# Allegro board gumstix_expansion_v1.brd
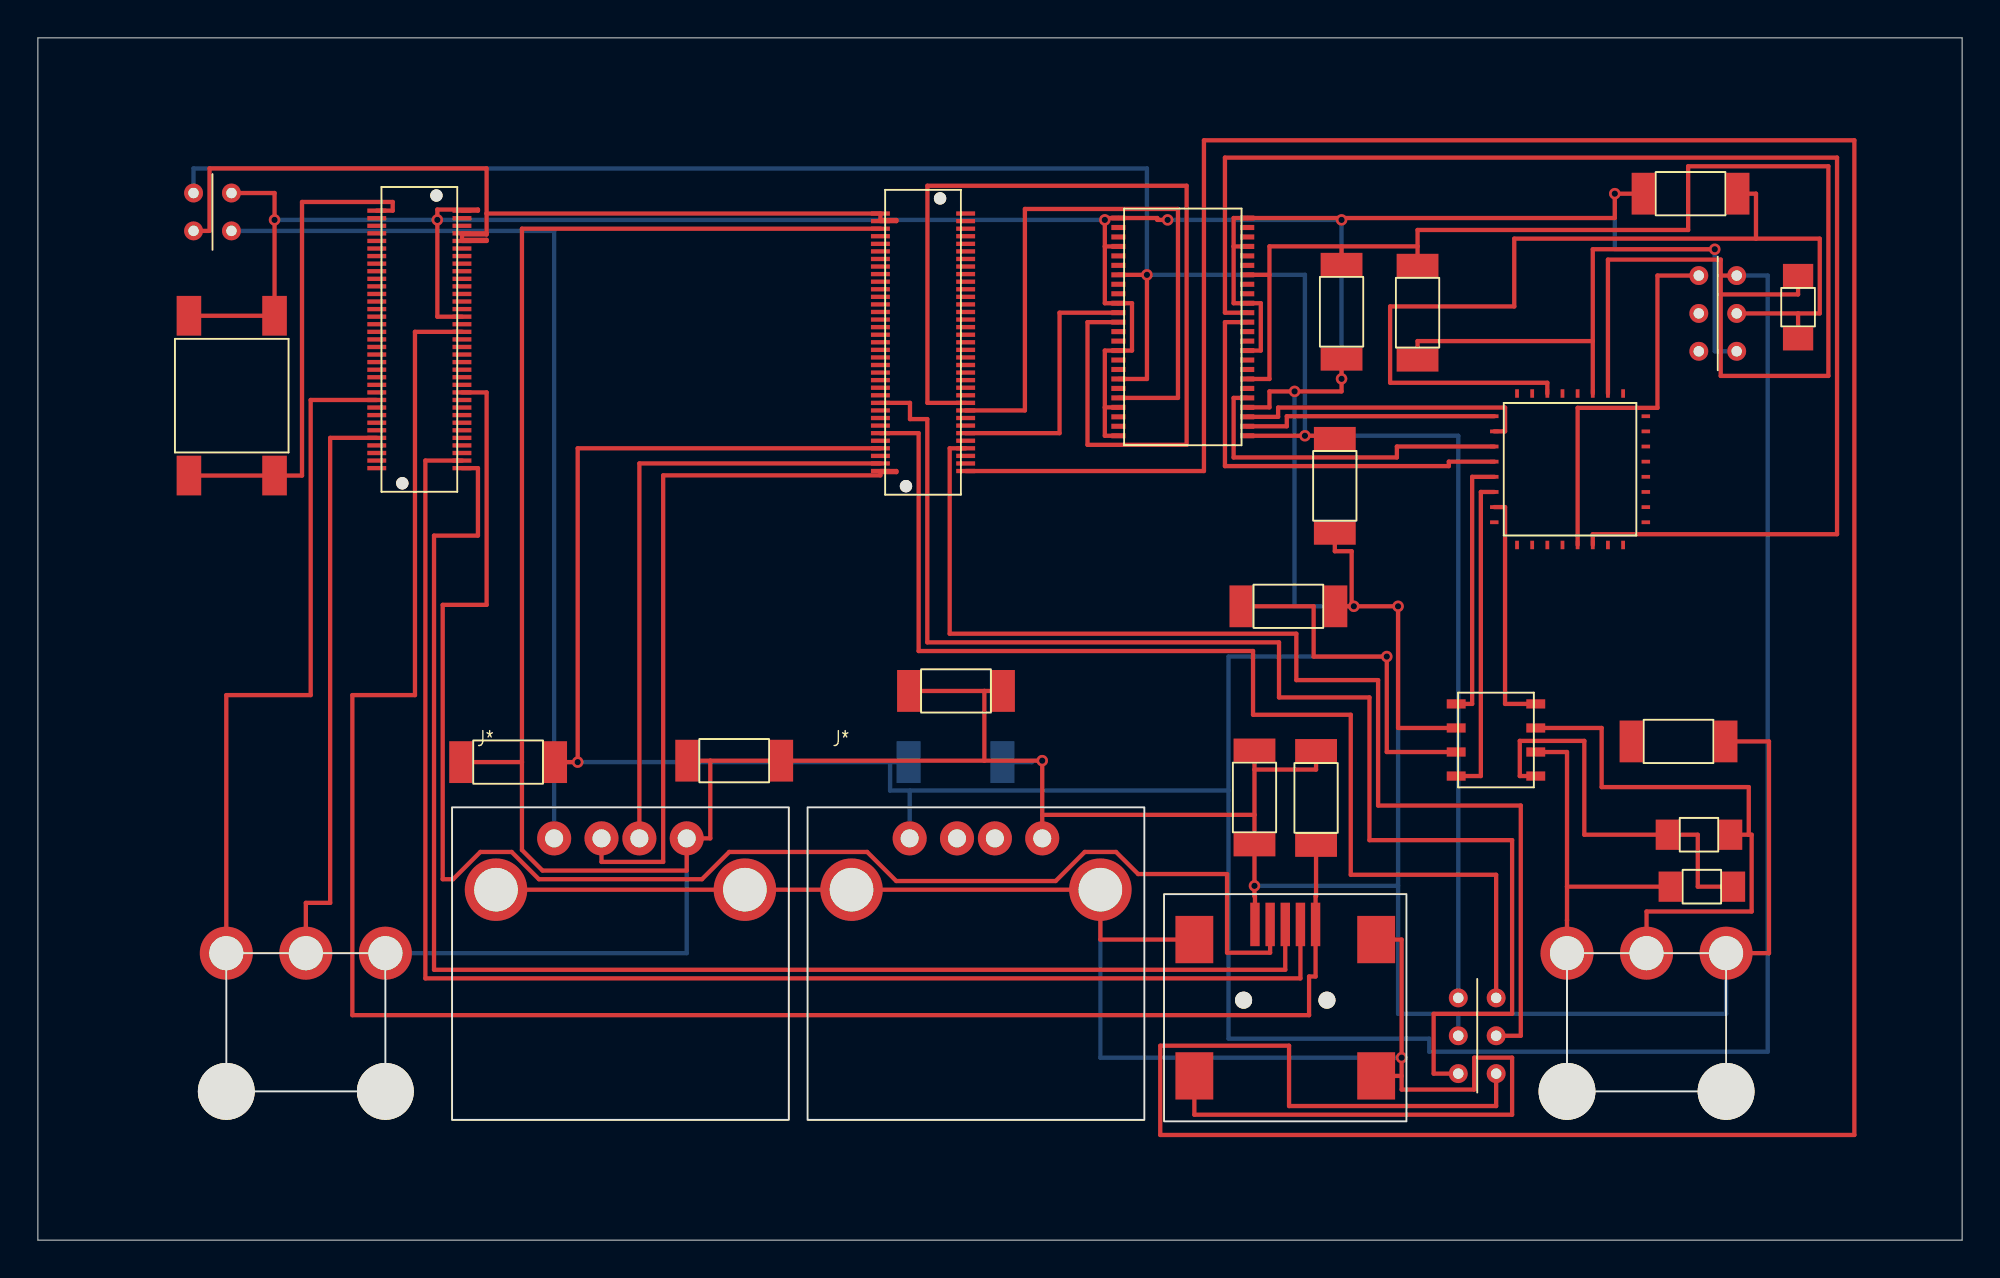
[diagram p0: board, top side]
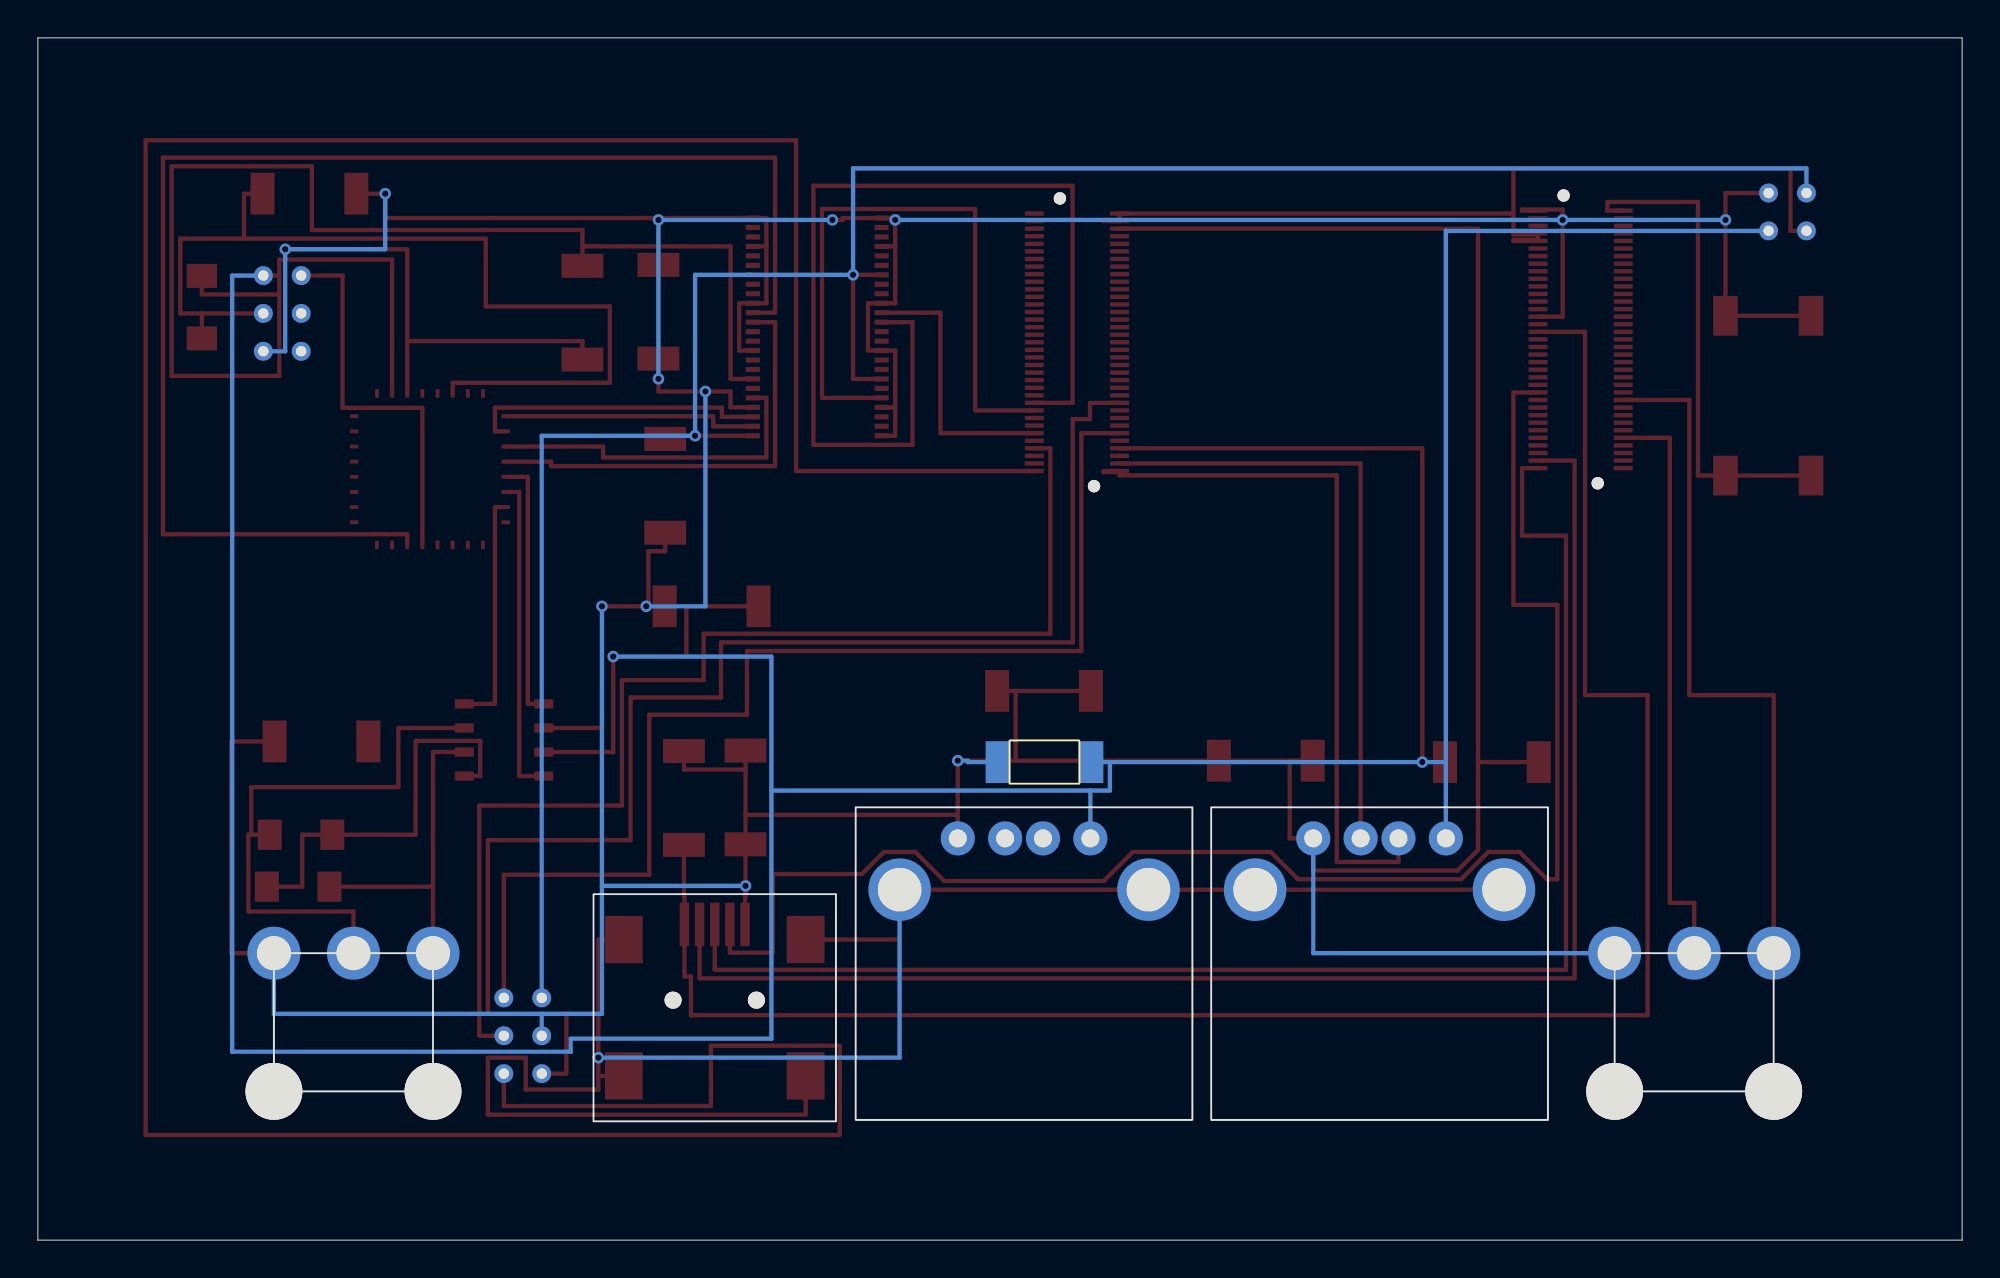
[diagram p1: board, bottom side, seen from below]

Outline 101.6 x 63.5 mm; copper layers: TOP, BOTTOM. Coordinates in mm from the lower left corner of the outline.
Outline path: 0,63.5 101.6,63.5 101.6,0 0,0 0,63.5

## Placement (name value [footprint] x y rotation side)
C1  4.7u  [SMDCAP]  24.89 25.25 0 top
C2  0.01u  [SMDCAP]  36.83 25.32 0 top
C3  4.7u  [SMDCAP]  48.39 25.25 180 bottom
C4  0.01u  [SMDCAP]  48.54 29.01 0 top
C5  4.7u  [SMDCAP]  67.49 23.29 270 top
C6  0.01u  [SMDCAP]  64.24 23.44 90 top
C7  0.1u  [SMDCAP]  68.83 49.1 90 top
C8  10u  [SMDCAP]  72.85 48.92 270 top
C9  0.1u  [SMDCAP]  66.09 33.48 0 top
C10  0.1u  [SMDCAP]  68.48 39.78 270 top
C11  0.1u  [SMDCAP]  86.56 26.34 180 top
C12  0.1u  [SMDCAP]  87.33 55.27 0 top
J1  GUMSTIX_J1  [GUMSTIX]  20.14 47.57 0 top
J2  GUMSTIX_J4  [GUMSTIX]  46.74 47.42 0 top
J3  4 HEADER  [DIP4_CONN]  9.22 54.31 0 top
J4  CON6  [USBA]  30.76 13.97 0 top
J6  CON6  [USBA]  49.53 13.97 0 top
J7  Background Header  [DIP6_CONN]  88.7 48.95 0 top
J9  CON3  [MOLEX_3]  14.15 11.51 0 top
J10  CON6  [DIP6_CONN]  76 10.8 0 top
J11  CON3  [MOLEX_3]  84.94 11.51 0 top
J12  CON9  [MUSBA_TSMT]  65.86 12.67 90 top
R3  60  [SMDRES]  87.71 21.41 0 top
R4  60  [SMDRES]  87.86 18.67 0 top
R5  10k  [SMDRES]  92.94 49.28 90 top
S1  -  [SWITCH]  10.24 44.6 270 top
U1  MC9S08DZ60  [MC9S08_LQFP32]  80.9 40.72 270 top
U2  SN74LVC16T245  [SN74_DGG]  60.45 48.23 180 top
U3  TJA1040T  [TJA1040_SO8]  76.99 26.42 0 top

## Library data of the parts
C1-C6 C8-C10 = C_elect_0: Tolerance: ***; User Part Number: ***
C7 C11 C12 = C: Tolerance: ***; User Part Number: ***
J1 = GUMSTIX_J1
J2 = GUMSTIX_J4
J3 = 4 HEADER
J4 J6 J10 = CON6
J7 = CONN MOD 6-6_J
J9 J11 = CON3
J12 = CON9
R3-R5 = R: Tolerance: ***; User Part Number: ***
S1 = SWITCH
U1 = MC9S08DZ60
U2 = SN74LVC16T245
U3 = TJA1040T

## Footprints (pads in the part's own frame, mm; a bottom-side part is the same pattern mirrored in y, then rotated)
DIP4_CONN
  round 1 hole 0.55: 1(-1,1) 2(-1,-1) 3(1,-1) 4(1,1)
DIP6_CONN
  round 1 hole 0.55: 1(-1,2) 2(-1,0) 3(-1,-2) 4(1,-2) 5(1,0) 6(1,2)
GUMSTIX
  round 0.65 hole 0.65 unplated: (-0.9,-7.6) (0.9,7.6)
  rect 1x0.23 smd: 1(-2.25,6.8) 2(-2.25,6.4) 3(-2.25,6) 4(-2.25,5.6) 5(-2.25,5.2) 6(-2.25,4.8) 7(-2.25,4.4) 8(-2.25,4) 9(-2.25,3.6) 10(-2.25,3.2) 11(-2.25,2.8) 12(-2.25,2.4) 13(-2.25,2) 14(-2.25,1.6) 15(-2.25,1.2) 16(-2.25,0.8) 17(-2.25,0.4) 18(-2.25,0) 19(-2.25,-0.4) 20(-2.25,-0.8) 21(-2.25,-1.2) 22(-2.25,-1.6) 23(-2.25,-2) 24(-2.25,-2.4) 25(-2.25,-2.8) 26(-2.25,-3.2) 27(-2.25,-3.6) 28(-2.25,-4) 29(-2.25,-4.4) 30(-2.25,-4.8) 31(-2.25,-5.2) 32(-2.25,-5.6) 33(-2.25,-6) 34(-2.25,-6.4) 35(-2.25,-6.8) 36(2.25,-6.8) 37(2.25,-6.4) 38(2.25,-6) 39(2.25,-5.6) 40(2.25,-5.2) 41(2.25,-4.8) 42(2.25,-4.4) 43(2.25,-4) 44(2.25,-3.6) 45(2.25,-3.2) 46(2.25,-2.8) 47(2.25,-2.4) 48(2.25,-2) 49(2.25,-1.6) 50(2.25,-1.2) 51(2.25,-0.8) 52(2.25,-0.4) 53(2.25,0) 54(2.25,0.4) 55(2.25,0.8) 56(2.25,1.2) 57(2.25,1.6) 58(2.25,2) 59(2.25,2.4) 60(2.25,2.8) 61(2.25,3.2) 62(2.25,3.6) 63(2.25,4) 64(2.25,4.4) 65(2.25,4.8) 66(2.25,5.2) 67(2.25,5.6) 68(2.25,6) 69(2.25,6.4) 70(2.25,6.8)
MC9S08_LQFP32
  rect 0.45x0.2 smd: 1(-4,2.8) 2(-4,2) 3(-4,1.2) 4(-4,0.4) 5(-4,-0.4) 6(-4,-1.2) 7(-4,-2) 8(-4,-2.8) 17(4,-2.8) 18(4,-2) 19(4,-1.2) 20(4,-0.4) 21(4,0.4) 22(4,1.2) 23(4,2) 24(4,2.8)
  rect 0.2x0.45 smd: 9(-2.8,-4) 10(-2,-4) 11(-1.2,-4) 12(-0.4,-4) 13(0.4,-4) 14(1.2,-4) 15(2,-4) 16(2.8,-4) 25(2.8,4) 26(2,4) 27(1.2,4) 28(0.4,4) 29(-0.4,4) 30(-1.2,4) 31(-2,4) 32(-2.8,4)
MOLEX_3
  round 3 hole 3 unplated: (-4.2,-3.65) (4.2,-3.65)
  round 2.8 hole 1.8: 1(-4.2,3.65) 2(0,3.65) 3(4.2,3.65)
MUSBA_TSMT
  round 0.9 hole 0.9 unplated: (0,2.2) (0,-2.2)
  rect 2.3x0.5 smd: 1(4,-1.6) 2(4,-0.8) 3(4,0) 4(4,0.8) 5(4,1.6)
  rect 2.5x2 smd: 6(-4,4.8) 7(-4,-4.8) 8(3.2,-4.8) 9(3.2,4.8)
SMDCAP
  rect 1.27x2.21 smd: 1(-2.54,0) 2(2.413,0)
SMDRES
  rect 1.27x1.6 smd: 1(-1.651,0) 2(1.651,0)
SN74_DGG
  rect 0.75x0.27 smd: 1(-3.4,5.75) 2(-3.4,5.25) 3(-3.4,4.75) 4(-3.4,4.25) 5(-3.4,3.75) 6(-3.4,3.25) 7(-3.4,2.75) 8(-3.4,2.25) 9(-3.4,1.75) 10(-3.4,1.25) 11(-3.4,0.75) 12(-3.4,0.25) 13(-3.4,-0.25) 14(-3.4,-0.75) 15(-3.4,-1.25) 16(-3.4,-1.75) 17(-3.4,-2.25) 18(-3.4,-2.75) 19(-3.4,-3.25) 20(-3.4,-3.75) 21(-3.4,-4.25) 22(-3.4,-4.75) 23(-3.4,-5.25) 24(-3.4,-5.75) 25(3.4,-5.75) 26(3.4,-5.25) 27(3.4,-4.75) 28(3.4,-4.25) 29(3.4,-3.75) 30(3.4,-3.25) 31(3.4,-2.75) 32(3.4,-2.25) 33(3.4,-1.75) 34(3.4,-1.25) 35(3.4,-0.75) 36(3.4,-0.25) 37(3.4,0.25) 38(3.4,0.75) 39(3.4,1.25) 40(3.4,1.75) 41(3.4,2.25) 42(3.4,2.75) 43(3.4,3.25) 44(3.4,3.75) 45(3.4,4.25) 46(3.4,4.75) 47(3.4,5.25) 48(3.4,5.75)
SWITCH
  rect 2.1x1.3 smd: 1(-4.22,2.26) 2(-4.22,-2.26) 3(4.22,-2.26) 4(4.22,2.26)
TJA1040_SO8
  rect 1x0.49 smd: 1(-2.1,1.905) 2(-2.1,0.635) 3(-2.1,-0.635) 4(-2.1,-1.905) 5(2.1,-1.905) 6(2.1,-0.635) 7(2.1,0.635) 8(2.1,1.905)
USBA
  round 3.3 hole 2.3 unplated: (-6.57,4.54) (6.57,4.54)
  round 1.8 hole 0.95: 1(-3.5,7.25) 2(-1,7.25) 3(1,7.25) 4(3.5,7.25)

## Nets
GND: C1.1(+) C2.1(+) C2.2(-) C3.1(+) C4.1(+) C4.2(-) C5.1(+) C6.1(+) C6.2(-) C7.1 C8.2(-) C9.2(-) C10.2(-) C11.1 C12.1 J1.56(GND#56) J1.70(GND#70) J2.3(GND#3) J2.33(GND#33) J3.4 J4.4 J6.4 J7.4(2) J9.3 J10.2 J11.3 J12.5 S1.1 S1.2 U1.3(VSS) U2.4(GND#4) U2.10(GND#10) U2.15(GND#15) U2.21(GND#21) U2.24(2DIR) U2.25(2OEN) U2.28(GND#28) U2.34(GND#34) U2.39(GND#39) U2.45(GND#45) U2.48(1OEN) U3.2(GND)
VCC_1.8: C10.1(+) J3.1 J10.1 U2.1(1DIR) U2.31(VCCA#31) U2.42(VCCA#42)
VCC_3.3: J1.66(VSYSTEM#66) J1.67(VSYSTEM#67) J2.1(VSYSTEM#1) J2.2(VSYSTEM#2) J3.2
BKGD: J7.1 U1.21(BKGD/MS)
CANH: J11.2 R3.2 U3.7(CANH)
CANL: J11.1 R4.1 U3.6(CANL)
COMMON_SHIELD: J12.6 J12.7 J12.8 J12.9
GPIO18: J2.26(GPIO18_MMC3_D0) J10.3
GPIO19: J2.36(GPIO19_MMC3_D1) J10.4
GPIO20: J2.39(GPIO20_MMC3_D2) J10.5
GPIO21: J2.30(GPIO21_MMC3_DAT7) J10.6
GPIO165_IR_RXD3: J1.31(GPIO165_IR_RXD3) J9.2
GPIO166_IR_TXD3: J1.26(GPIO166_IR_TXD3) J9.1
RESET: C12.2 J7.5(4) R5.1 U1.6(RESETN)
RXCAN: U1.14(PTE7/RXD2/RXCAN) U3.4(RXD)
SPI_CLOCK_1.8V: J2.43(GPIO171_SPI1_CLK) U2.46(1A2)
SPI_CLOCK_5V: U1.10(PTE3/SPSCK) U2.3(1B2)
SPI_CS_1.8V: J2.42(GPIO175_SPI1_CS1) U2.47(1A1)
SPI_CS_5V: U1.9(PTE2/SSN) U2.2(1B1)
SPI_INTERRUPT_1.8V: J2.41(GPIO114_SPI1_NIRQ) U2.35(2A2)
SPI_INTERRUPT_5V: U1.22(PTB0/PIB0/ADP8) U2.14(2B2)
SPI_MISO_1.8V: J2.45(GPIO173_SPI1_MISO) U2.36(2A1)
SPI_MISO_5V: U1.12(PTE5/SDA/MISO) U2.13(2B1)
SPI_MOSI_1.8V: J2.44(GPIO172_SPI1_MOSI) U2.44(1A3)
SPI_MOSI_5V: U1.11(PTE4/SCL/MOSI) U2.5(1B3)
STB: U1.15(PTD0/PID0/TPM2CH0) U3.8(STB)
TXCAN: U1.13(PTE6/TXD2/TXCAN) U3.1(TXD)
USB_OTG_DM: J1.37(USBOTG_DM) J12.2
USB_OTG_DP: J1.36(USBOTG_DP) J12.3
USB_OTG_ID: J1.46(USBOTG_ID) J12.4
USB_OTG_VBUS: C5.2(-) J1.54(USBOTG_VBUS) J12.1
USBH_DM: J2.35(USBH_DM) J4.2
USBH_DP: J2.34(USBH_DP) J4.3
USBH_VBUS: C1.2(-) C3.2(-) C7.2 C8.1(+) C9.1(+) J2.32(USBH_VBUS) J3.3 J4.1 J6.1 J7.6 R5.2 U1.2(VDD) U2.7(VCCB#7) U2.18(VCCB#18) U3.3(VCC)
N03550: J1.1(NRESPWRON) S1.3 S1.4
N10323: R3.1 R4.2 U3.5(SPLIT)

Pads without a net: C11 2; J1 2 3 4 5 6 7 8 9 10 11 12 13 14 15 16 17 18 19 20 21 22 23 24 25 27 28 29 30 32 33 34 35 38 39 40 41 42 43 44 45 47 48 49 50 51 52 53 55 57 58 59 60 61 62 63 64 65 68 69; J2 4 5 6 7 8 9 10 11 12 13 14 15 16 17 18 19 20 21 22 23 24 25 27 28 29 31 37 38 40 46 47 48 49 50 51 52 53 54 55 56 57 58 59 60 61 62 63 64 65 66 67 68 69 70; J6 2 3; J7 2 3; U1 1 4 5 7 8 16 17 18 19 20 23 24 25 26 27 28 29 30 31 32; U2 6 8 9 11 12 16 17 19 20 22 23 26 27 29 30 32 33 37 38 40 41 43

## Via types
v1: diameter 0.61, hole 0.33, TOP to BOTTOM, 18 vias

## Routing (per net, layer and track width the routed paths; a pad name or vN(x,y) marks a point on that pad's centre or on a via; arc(x,y) is an arc through that point)
GND: length 434.1
  TOP w0.229: J2.3 25.56,53.42 25.56,25.25 ; 25.56,25.25 25.56,20.61 26.64,19.52 34.26,19.52 J4.4 35.5,21.22 35.5,25.32 ; 25.56,25.25 C1.1 ; 35.5,25.32 C2.2 49.97,25.32 ; 35.5,25.32 C2.1 ; 63.13,52.48 63.13,53.98 U2.24 83.26,53.98 v1(83.26,55.27) C12.1 ; 63.13,52.48 63.13,49.48 U2.15 64.57,49.48 64.57,46.98 U2.10 ; 63.13,52.48 U2.21 ; 49.97,25.32 49.97,29.01 ; 49.97,25.32 v1(53.03,25.32) 53.03,22.46 ; 49.97,29.01 C4.1 ; 49.97,29.01 C4.2 ; C10.2 68.48,36.39 69.37,36.39 69.37,33.48 ; 56.33,52.48 56.33,49.48 U2.34 57.77,49.48 57.77,46.98 U2.39 56.33,46.98 56.33,43.98 ; 56.33,52.48 v1(56.33,53.89) 56.33,53.98 U2.25 59.1,53.98 59.1,53.89 v1(59.65,53.89) ; 56.33,52.48 U2.28 ; J1.56 21.09,48.77 v1(21.09,53.89) 21.09,54.43 23.24,54.43 23.24,54.37 J1.70 ; 69.37,33.48 v1(69.48,33.48) v1(71.82,33.48) 71.82,27.05 U3.2 ; 69.37,33.48 C9.2 ; C8.2 72.85,47.49 82.1,47.49 ; U2.45 56.33,43.98 ; 56.33,43.98 56.33,42.48 U2.48 ; S1.2 S1.1 v1(12.5,53.89) 12.5,55.31 J3.4 ; U1.3 82.1,47.49 ; 82.1,47.49 82.1,52.33 v1(88.54,52.33) ; C7.1 v1(68.83,45.49) 68.83,44.83 v1(66.35,44.83) 65.03,44.83 65.03,43.98 U2.4 ; 64.24,22.46 C6.1 v1(64.24,18.71) 64.24,18.17 64.26,18.17 J12.5 ; 64.24,22.46 64.24,24.85 ; 64.24,22.46 53.03,22.46 ; J11.3 91.4,15.16 91.4,26.34 C11.1 ; 64.24,24.85 67.49,24.85 C5.1 ; 64.24,24.85 C6.2 ; 53.03,22.46 J6.4
  BOTTOM w0.229: J7.4 88.54,46.95 v1(88.54,52.33) 83.26,52.33 v1(83.26,55.27) ; v1(66.35,44.83) 66.35,33.48 v1(69.48,33.48) ; C3.1 52.48,25.25 52.48,25.32 v1(53.03,25.32) ; J10.2 75,11.95 ; 75,11.95 71.82,11.95 71.82,18.71 ; 75,11.95 89.14,11.95 J11.3 ; v1(12.5,53.89) v1(21.09,53.89) v1(56.33,53.89) ; 71.82,18.71 v1(64.24,18.71) ; 71.82,18.71 v1(71.82,33.48) ; v1(68.83,45.49) v1(68.83,53.89) v1(59.65,53.89) ; J9.3 34.26,15.16 J4.4
VCC_1.8: length 125.2
  TOP w0.229: U2.42 58.56,45.48 v1(58.56,50.98) U2.31 ; C10.1 68.48,42.48 v1(66.9,42.48) U2.1
  BOTTOM w0.229: J3.1 8.22,56.61 58.56,56.61 v1(58.56,50.98) 66.9,50.98 v1(66.9,42.48) 75,42.48 J10.1
VCC_3.3: length 50.7
  TOP w0.229: 23.69,53.17 23.69,53.12 22.39,53.12 22.39,52.83 23.69,52.83 23.69,52.77 J1.66 ; 23.69,53.17 J1.67 ; 23.69,53.17 23.69,54.22 ; J2.2 45.33,53.82 45.33,53.88 44.49,53.88 J2.1 23.69,54.22 ; 23.69,54.22 23.69,56.61 9.06,56.61 9.06,53.31 J3.2
BKGD: length 20.6
  TOP w0.229: J7.1 85.51,50.95 85.51,43.96 81.3,43.96 U1.21
CANH: length 29.8
  TOP w0.229: 90.34,21.41 90.49,21.41 90.49,17.36 84.94,17.36 J11.2 ; 90.34,21.41 R3.2 ; 90.34,21.41 90.34,23.93 82.57,23.93 82.57,27.05 U3.7
CANL: length 17.7
  TOP w0.229: 80.74,18.67 80.74,25.78 U3.6 ; 80.74,18.67 R4.1 ; 80.74,18.67 80.74,16.9 J11.1
COMMON_SHIELD: length 104.3
  TOP w0.229: 72.01,8.67 v1(72.01,9.64) 72.01,15.87 J12.8 ; 72.01,8.67 72.01,7.95 75.84,7.95 75.84,9.64 77.84,9.64 77.84,6.62 61.06,6.62 J12.6 ; 72.01,8.67 J12.7 ; 24.19,18.51 56.1,18.51 56.1,15.87 J12.9
  BOTTOM w0.229: 56.1,18.51 56.1,9.64 v1(72.01,9.64)
GPIO18: length 74.2
  TOP w0.229: J10.3 73.7,8.8 73.7,11.95 77.84,11.95 77.84,21.13 70.31,21.13 70.31,28.66 65.53,28.66 65.53,31.57 46.96,31.57 46.96,43.36 46.05,43.36 46.05,44.22 J2.26
GPIO19: length 180.9
  TOP w0.229: J10.4 77,7.08 66.06,7.08 66.06,10.27 59.26,10.27 59.26,5.56 95.91,5.56 95.91,58.09 61.57,58.09 61.57,40.62 J2.36
GPIO20: length 63.3
  TOP w0.229: J10.5 78.3,10.8 78.3,22.95 70.76,22.95 70.76,29.58 66.45,29.58 66.45,32.03 48.14,32.03 48.14,41.82 J2.39
GPIO21: length 62.3
  TOP w0.229: J2.30 46.5,42.62 46.5,31.11 64.16,31.11 64.16,27.75 69.32,27.75 69.32,19.3 77,19.3 J10.6
GPIO165_IR_RXD3: length 31
  TOP w0.229: J1.31 15.43,42.37 15.43,17.81 14.15,17.81 J9.2
GPIO166_IR_TXD3: length 37.2
  TOP w0.229: J9.1 9.95,28.79 14.4,28.79 14.4,44.37 J1.26
RESET: length 52.2
  TOP w0.229: R5.1 92.94,48.95 ; 92.94,48.95 94.08,48.95 94.08,52.9 90.72,52.9 ; 92.94,48.95 J7.5 ; 90.72,52.9 77.95,52.9 77.95,49.31 71.4,49.31 71.4,45.28 79.7,45.28 U1.6 ; 90.72,52.9 90.72,55.27 C12.2
RXCAN: length 17
  TOP w0.229: U3.4 76.19,24.51 76.19,39.52 U1.14
SPI_CLOCK_5V: length 15.9
  TOP w0.229: U1.10 77.47,42.72 77.47,43.97 65.48,43.97 65.48,43.48 U2.3
SPI_CS_5V: length 13.6
  TOP w0.229: U2.2 65.94,42.98 65.94,43.52 U1.9
SPI_INTERRUPT_1.8V: length 14.4
  TOP w0.229: U2.35 53.94,48.98 53.94,42.62 J2.41
SPI_INTERRUPT_5V: length 75
  TOP w0.229: U2.14 62.68,48.98 62.68,57.18 95,57.18 95,37.28 82.1,37.28 U1.22
SPI_MISO_1.8V: length 54.2
  TOP w0.229: U2.36 55.42,48.48 55.42,42.01 60.65,42.01 60.65,55.69 46.97,55.69 46.97,44.22 J2.45
SPI_MISO_5V: length 23.2
  TOP w0.229: U2.13 62.68,48.48 62.68,40.88 74.5,40.88 74.5,41.12 U1.12
SPI_MOSI_1.8V: length 35
  TOP w0.229: U2.44 60.2,44.48 60.2,54.46 52.11,54.46 52.11,43.82 J2.44
SPI_MOSI_5V: length 18.2
  TOP w0.229: U1.11 71.75,41.92 71.75,41.34 63.13,41.34 63.13,44.48 U2.5
STB: length 12.6
  TOP w0.229: U1.15 77.47,38.72 77.47,28.32 U3.8
TXCAN: length 14
  TOP w0.229: U1.13 75.73,40.32 75.73,28.32 U3.1
USB_OTG_DM: length 78.3
  TOP w0.229: J12.2 66.66,13.82 20.46,13.82 20.46,41.17 J1.37
USB_OTG_DP: length 77
  TOP w0.229: J1.36 23.24,40.77 23.24,37.21 20.92,37.21 20.92,14.28 65.86,14.28 J12.3
USB_OTG_ID: length 82.2
  TOP w0.229: J1.46 23.69,44.77 23.69,33.55 21.37,33.55 21.37,19.06 21.92,19.06 23.36,20.5 25.01,20.5 26.46,19.06 35.06,19.06 36.5,20.5 43.79,20.5 45.32,18.97 53.74,18.97 55.27,20.5 56.93,20.5 58.09,19.34 62.79,19.34 62.79,15.18 65.06,15.18 J12.4
USB_OTG_VBUS: length 101.8
  TOP w0.229: C5.2 67.49,18.17 67.46,18.17 J12.1 67.46,13.92 67.12,13.92 67.12,11.88 16.6,11.88 16.6,28.79 19.91,28.79 19.91,47.97 J1.54
USBH_DM: length 38.3
  TOP w0.229: J2.35 45.33,40.62 45.33,40.56 44.49,40.56 44.49,40.39 33.02,40.39 33.02,19.98 29.76,19.98 J4.2
USBH_DP: length 32.5
  TOP w0.229: J2.34 31.76,41.02 J4.3
USBH_VBUS: length 329.8
  TOP w0.229: C8.1 72.85,52.49 ; 72.85,52.49 72.85,53.35 87.13,53.35 87.13,56.72 94.54,56.72 94.54,45.65 88.85,45.65 88.85,49.95 ; 72.85,52.49 68.83,52.49 ; U2.18 65.03,50.98 ; 65.03,50.98 65.03,52.49 68.83,52.49 ; 65.03,50.98 65.03,45.48 U2.7 ; R5.2 92.94,49.95 88.85,49.95 ; C1.2 v1(28.5,25.25) 28.5,41.82 J2.32 ; J7.6 88.85,50.95 ; 88.85,50.95 88.85,49.95 ; 88.85,50.95 88.85,51.79 82.9,51.79 U1.2 ; U3.3 71.22,25.78 v1(71.22,30.82) 67.36,30.82 67.36,33.48 C9.1 ; 68.83,52.49 C7.2
  BOTTOM w0.229: 45,25.25 45,23.75 46.03,23.75 ; 45,25.25 C3.2 ; 45,25.25 v1(28.5,25.25) 27.26,25.25 ; 27.26,25.25 27.26,53.31 J3.3 ; 27.26,25.25 J4.1 ; J7.6 91.34,50.95 91.34,9.95 73.47,9.95 73.47,10.64 62.87,10.64 62.87,23.75 ; v1(71.22,30.82) 62.87,30.82 62.87,23.75 ; J6.1 46.03,23.75 ; 46.03,23.75 62.87,23.75
N03550: length 26.5
  TOP w0.229: S1.3 S1.4 13.95,40.38 13.95,54.83 18.74,54.83 18.74,54.37 J1.1
N10323: length 21.7
  TOP w0.229: U3.5 78.24,24.51 78.24,26.37 81.65,26.37 81.65,21.41 R3.1 87.64,21.41 87.64,18.67 R4.2
